# Altium PCB Cooling_Protection PCB.PcbDoc
Units mm, origin at the board's own origin, x right, y up, seen from the top; angles counter-clockwise.
Board outline 50 x 50 mm, 2 copper layers (Top Layer, Bottom Layer); 19 components, 11 nets, 57 pads, 17 vias.
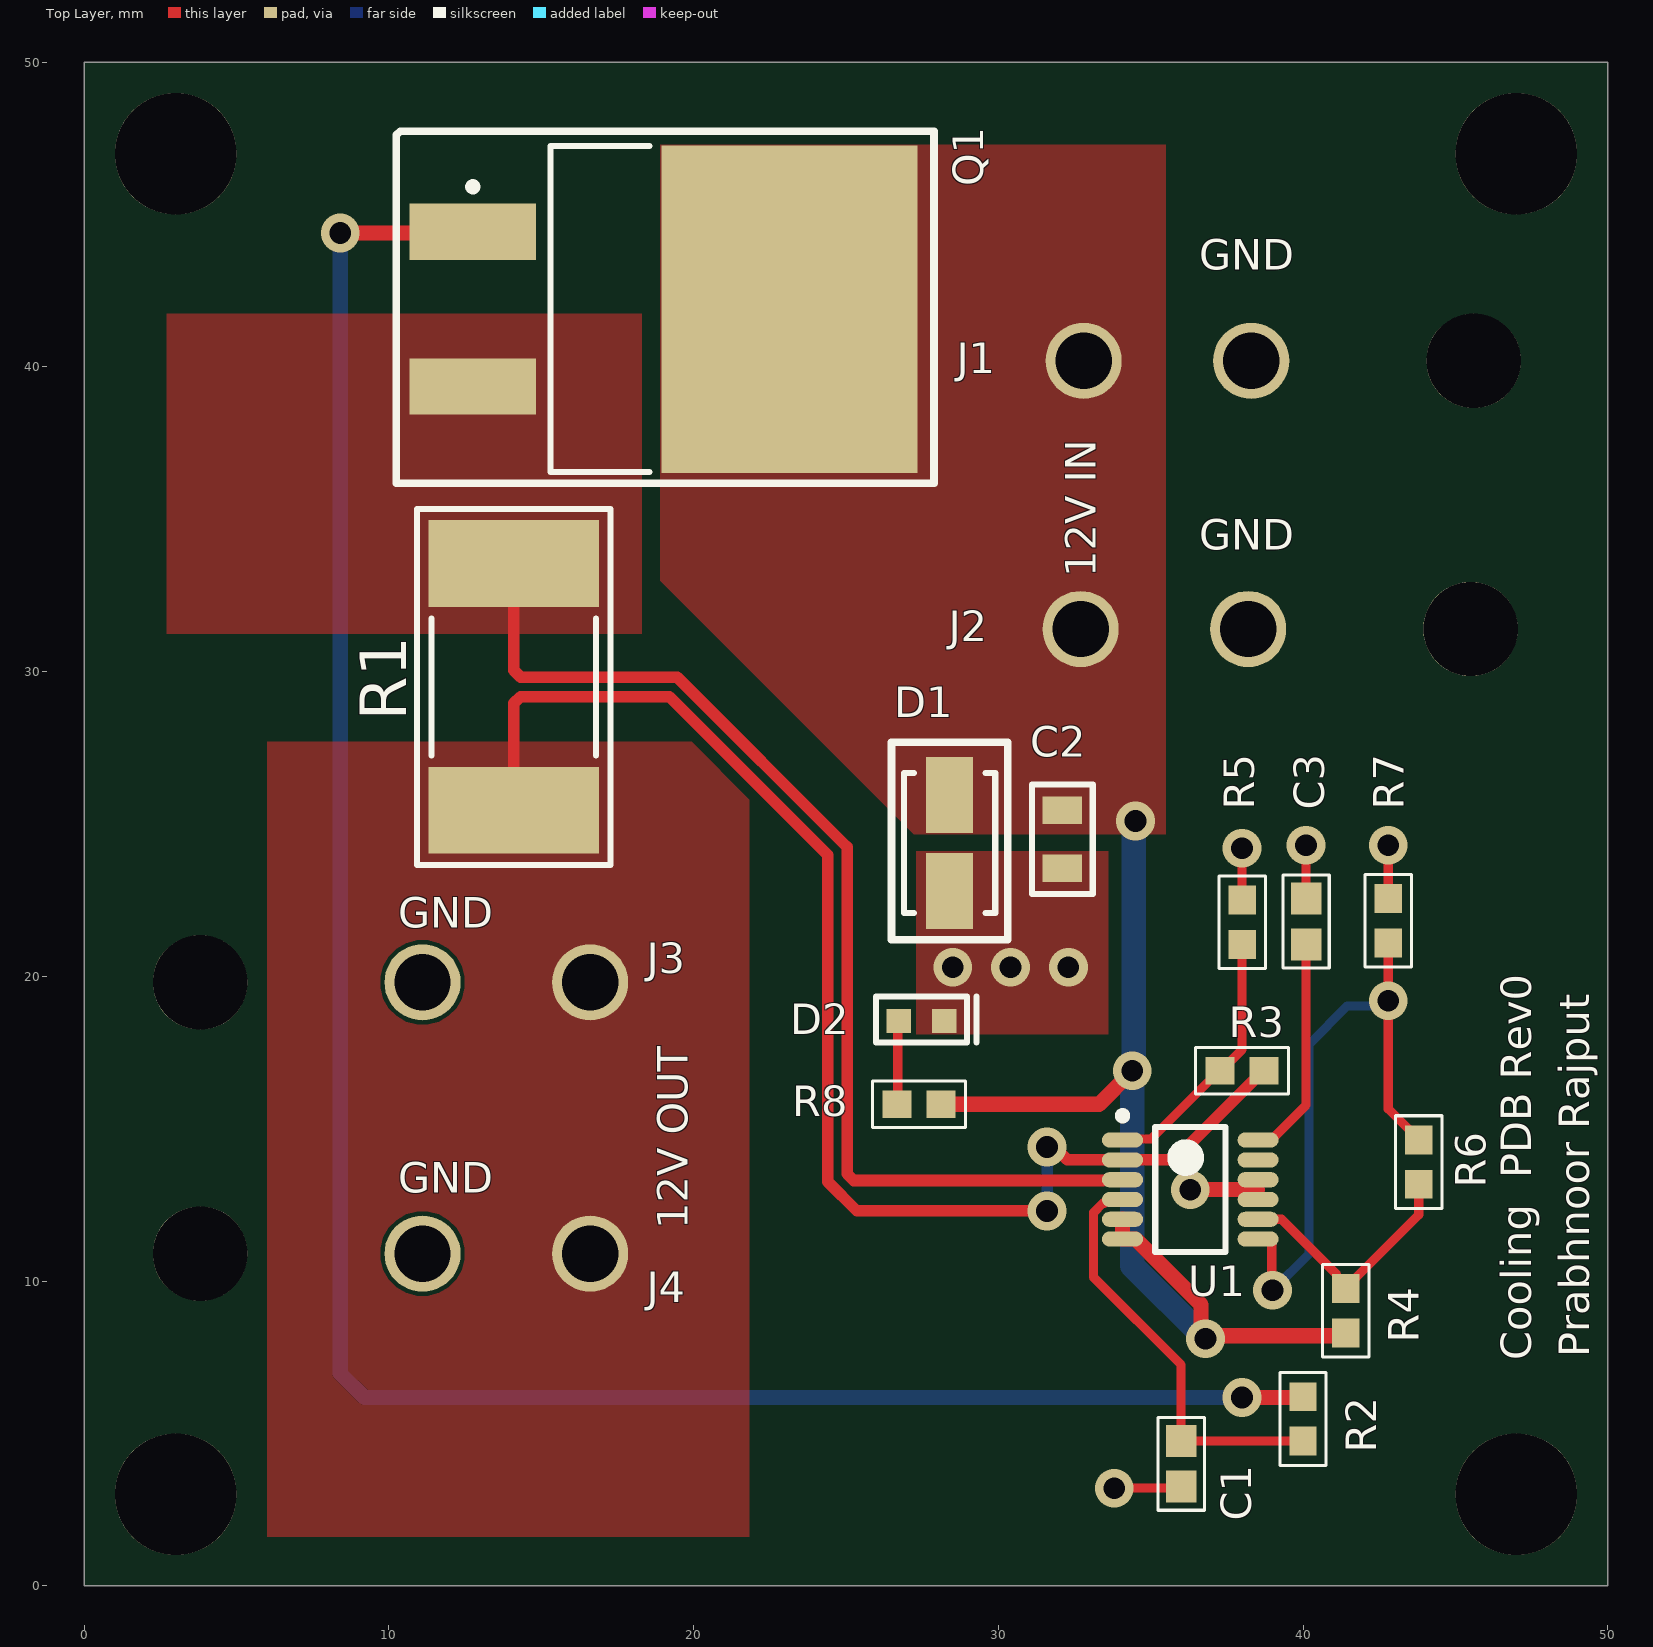
[diagram p0: Top Layer view]
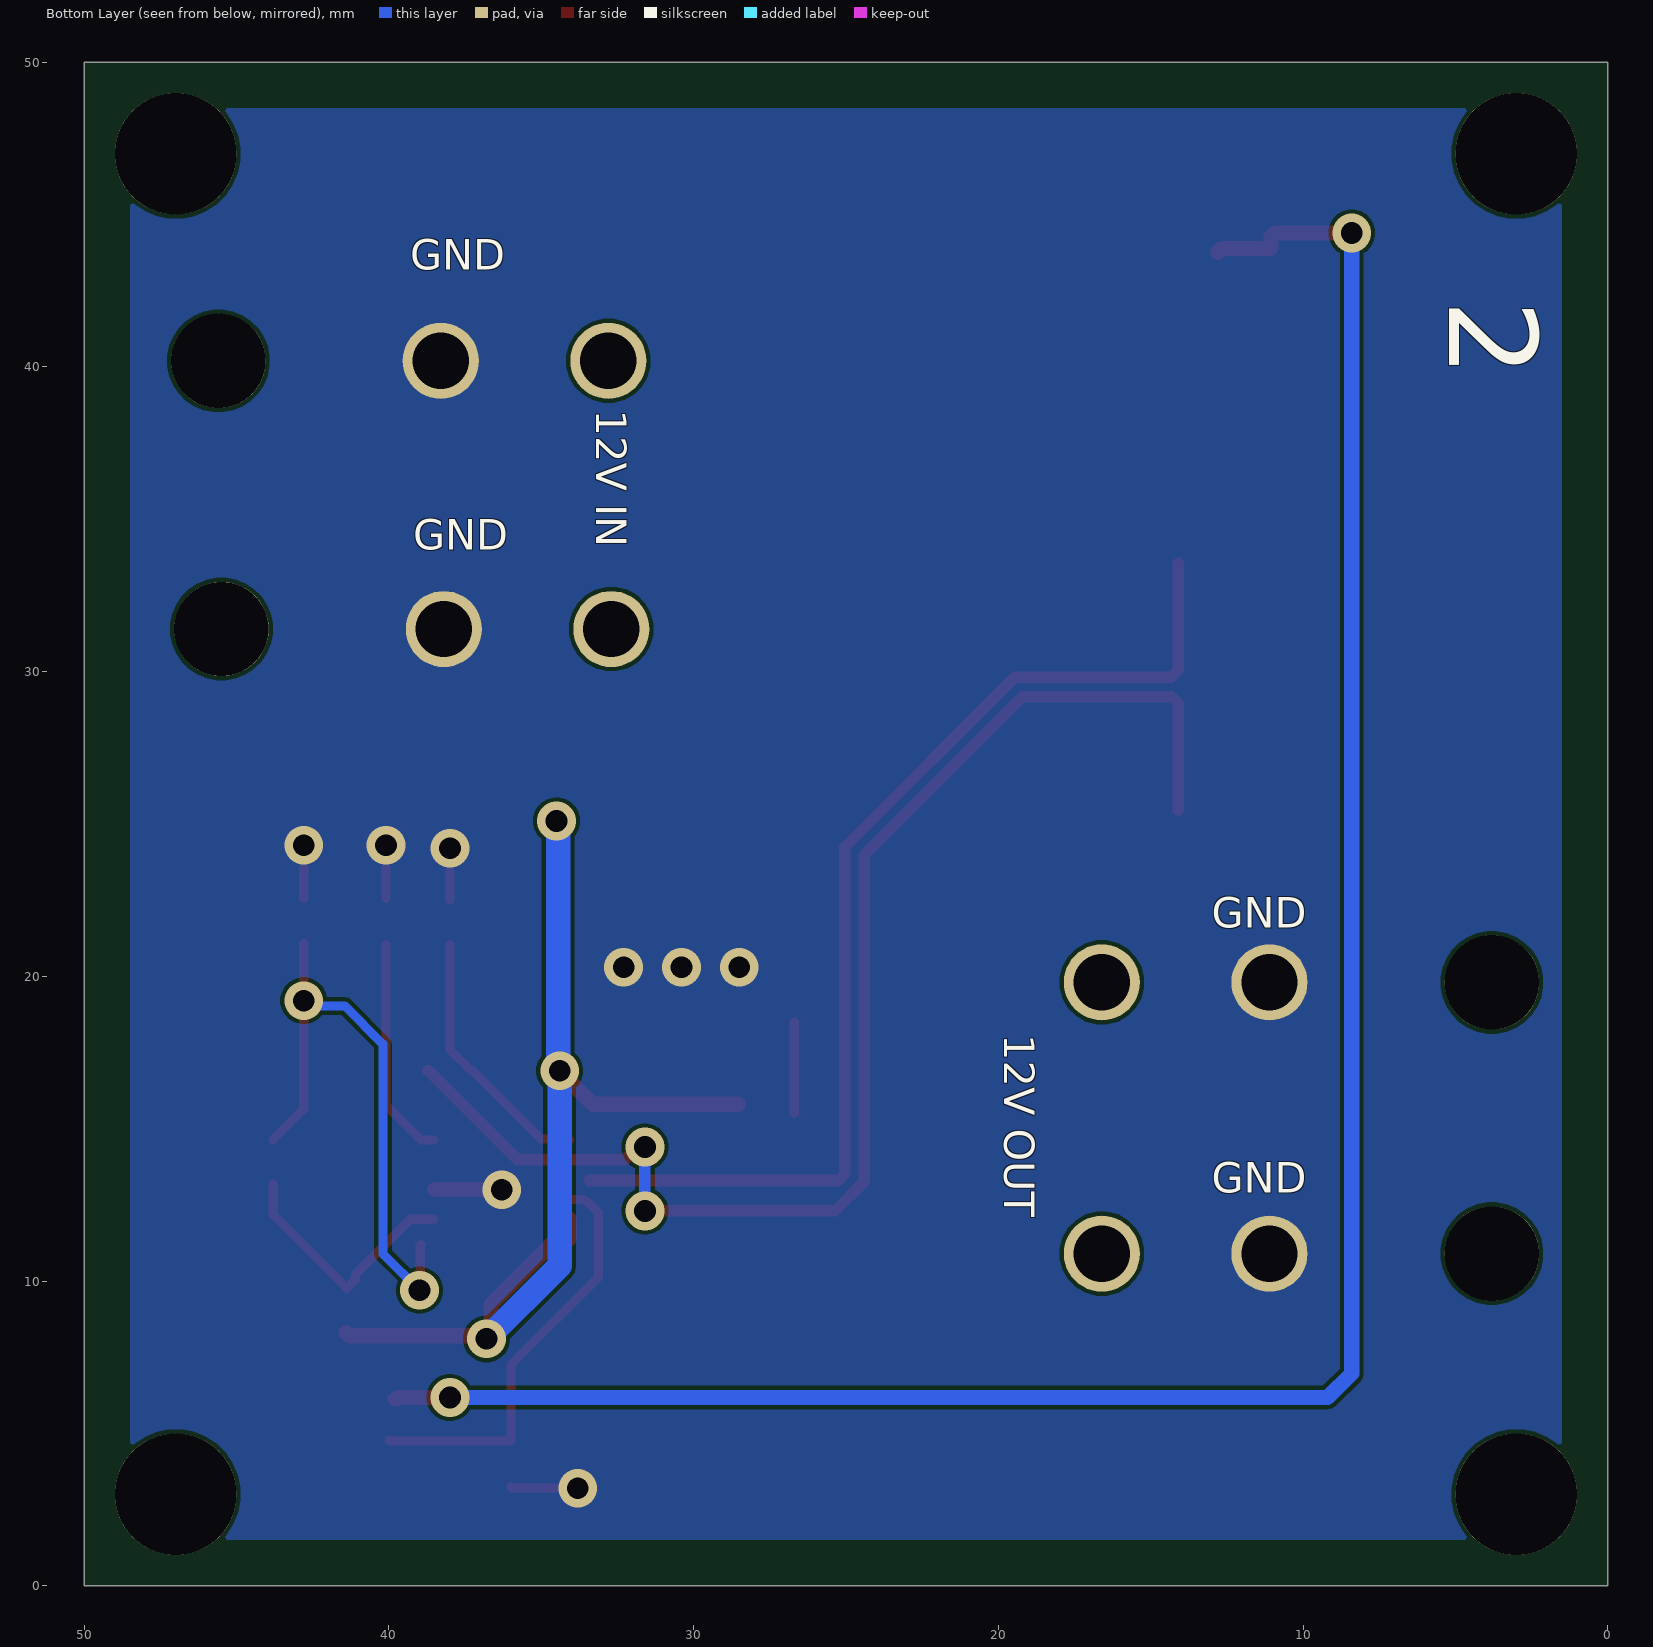
[diagram p1: Bottom Layer view, seen from below]

## Layer stack, top to bottom
Top Solder: solder mask 0.0102, Solder Resist, Dk 3.5
Top Layer: signal copper 0.0356
Dielectric 1: dielectric 0.32, FR-4, Dk 4.8
Bottom Layer: signal copper 0.0356
Bottom Solder: solder mask 0.0102, Solder Resist, Dk 3.5

## Board outline
0,0 50,0 50,50 0,50

## Design rules (kind name [scope] priority, off if disabled: settings)
Clearance [All] p1: gap=0.127 ignorepadtopadclearanceinfootprint=FALSE except(0: Arc-Hole Track-Hole SMDPad-Hole THPad-Hole Via-Hole Fill-Hole Poly-Hole Region-Hole Text-Hole)
DiffPairsRouting [All] p1: maxlimit=0.254 minlimit=0.254 mostfreqgap=0.254 toplayer_minwidth=0.381 toplayer_maxwidth=0.381 toplayer_prefwidth=0.381 bottomlayer_minwidth=0.381 bottomlayer_maxwidth=0.381 bottomlayer_prefwidth=0.381 maxuncoupledlength=12.7
PolygonConnect [All] p1: connectstyle=Direct reliefconductorwidth=0.254 reliefentries=4 polygonreliefangle="90 Angle" airgapwidth=0.254
RoutingVias [All] p1: holewidth=0.711 width=1.27 viastyle="Through Hole" minholewidth=0.711 minwidth=1.27 maxholewidth=0.711 maxwidth=1.27
SolderMaskExpansion [All] p1: expansion=0.102 istentingtop=FALSE
Width [All] p1: maxlimit=5 minlimit=0.2 preferedwidth=0.25 minimp=50.000000 maximp=50.000000 favimp=50.000000
29 further rules are at their usual default settings.

## Classes and differential pairs
differential pair "Vin 12V": +"Vin 12V_P" -"Vin 12V_N"

## Components (designator, comment, footprint, x,y, rotation, side; value= is the part's Value field where it differs from the comment)
C1 "47n" C0603 36,4 r90 top
C2 "0.1u" C0805 32.1,24.5 r90 top
C3 "0.1u" C0603 40.1,21.8 r270 top
D1 "TVS" TVS 28.4,24.375 r270 top
D2 "R-LED" D-0603 27.5,18.6 r0 top
J1 "0768250002" 2X1PIN 32.8,40.2 r90 top
J2 "0768250002" 2X1PIN 32.7,31.4 r90 top
J3 "0768250002" 2X1PIN 16.6,19.8 r270 top
J4 "0768250002" 2X1PIN 16.6,10.9 r270 top
Q1 "N-Channel MOSFET" N-MOS 19,41.9 r0 top
R1 "2.5m" R3921 14.1,29.5 r270 top
R2 "10" R0603 40,5.475 r90 top
R3 "43K" R0603 38,16.9 r0 top
R4 "100k" R0603 41.4,9.025 r90 top
R5 "5.1K" R0603 38,21.775 r270 top
R6 "4.99k" R0603 43.8,13.9 r90 top
R7 "10k" R0603 42.8,21.825 r270 top
R8 "665" R0603 27.4,15.8 r0 top
U1 "LT4363IMS-2#TRPBF" TSOP65P490X110-12N 36.3,13 r0 top

## Footprints (in the part's own frame and the unit in brackets; to place one, negate y for a bottom-side part, rotate by r counter-clockwise, add the part's x,y. Pads: shape width x height; smd on the part's side, far side on the other; paste and mask are expansions set on the pad)
2X1PIN [mm]
  round 2.5 hole 1.85: 1(0,0) 2(0,-5.5)
  round 3.1 hole 3.1: 3(0,-12.8)
  body extent -4.15,-21.4 4.2,0.56, height 14.55
C0603 [mm] "Chip Capacitor, 2-Leads, Body 1.60x0.80mm, IPC Medium Density"
  rect 1.05x1 smd: 1(-0.75,0) 2(0.75,0)
  silkscreen extent -1.52,-0.76 1.52,0.76, body extent -0.87,-0.48 0.87,0.48, height 0.88
C0805 [mm]
  rect 0.9x1.3 smd: 1(-0.95,0) 2(0.95,0)
  silkscreen extent -1.8,-1 1.8,1
D-0603 [mm] "Molded Diode, 2-Leads, Body 1.50x0.80mm, IPC Medium Density"
  rect 0.8x0.8 smd: 1(-0.772,-0.066) 2(0.728,-0.066)
  silkscreen extent -1.52,-0.77 1.78,0.73
N-MOS [mm] "D2-PAK, 3-Pads, Body 7.94x8.70mm (max), IPC Medium Density"
  rect 4.15x1.85 smd: 1(-6.25,2.54) 3(-6.25,-2.54)
  rect 8.4x10.75 smd: 2(4.15,0)
  silkscreen extent -8.76,-5.71 8.89,5.84, body extent -6.58,-5.33 8.67,5.33, height 5.57
R0603 [mm] "Chip Resistor, 2-Leads, Body 1.60x0.80mm, IPC Medium Density"
  rect 0.95x0.9 smd: 1(-0.725,0) 2(0.725,0)
  silkscreen extent -1.52,-0.76 1.52,0.76, body extent -0.85,-0.45 0.85,0.45, height 0.55
R3921 [mm] "Chip Resistor, 2-Leads, Body 10.00x5.20mm, IPC Medium Density"
  rect 2.85x5.6 smd: 1(-4.05,0) 2(4.05,0)
  silkscreen extent -5.84,-3.18 5.84,3.18, body extent -5.13,-2.79 5.13,2.79, height 1.19
TSOP65P490X110-12N [mm] "TSOP, 12-Leads, Body 4.04x3.00mm, Pitch 0.65mm, IPC Medium Density"
  oval 1.35x0.5 smd: 1(-2.225,1.625) 2(-2.225,0.975) 3(-2.225,0.325) 4(-2.225,-0.325) 5(-2.225,-0.975) 6(-2.225,-1.625) 7(2.225,-1.625) 8(2.225,-0.975) 9(2.225,-0.325) 10(2.225,0.325) 11(2.225,0.975) 12(2.225,1.625)
  silkscreen extent -2.35,-2.05 1.15,2.55, body extent -2.45,-2.05 2.45,2.05, height 1.1
TVS [mm] "Molded Inductor, 2-Leads, Body 4.30x2.61mm, IPC Medium Density"
  rect 2.5x1.55 smd: 1(-1.575,0) 2(1.575,0)
  silkscreen extent -3.3,-1.91 3.18,1.91, body extent -2.52,-1.46 2.52,1.46, height 2.4

## Part data
C1: library part C0603C473K5RACTU, "C0603C 47nF Ceramic Multilayer Capacitor; 50 VDC; +125degC; X7R Dielec; +/-10%", Capacitance=47nF, Case Code (Imperial)=0603, Case Code (Metric)=1608, Dielectric=X7R, Dielectric Material=Ceramic, Manufacturer=KEMET, Max Operating Temperature=125°C, Min Operating Temperature=-55°C, Package Quantity=1, Supplier Part Number 1=339-C0603C473K5RAC7867CT-ND, Tolerance=10%, Voltage=50V, Case/Package=0603, Category="Ceramic Capacitors", ComponentLink1Description=https://datasheet.ciiva.com/6074/1776093-6074329.pdf?src-supplier=Farnell, ComponentLink1URL=https://datasheet.ciiva.com/6074/1776093-6074329.pdf?src-supplier=Farnell, ComponentLink2Description=https://datasheet.ciiva.com/28682/1851736-28682298.pdf?src-supplier=Element14, ComponentLink2URL=https://datasheet.ciiva.com/28682/1851736-28682298.pdf?src-supplier=Element14, ComponentLink3Description=https://datasheet.ciiva.com/18193/getdatasheetpartid-94279-18193115.pdf?src-supplier=Verical, ComponentLink3URL=https://datasheet.ciiva.com/18193/getdatasheetpartid-94279-18193115.pdf?src-supplier=Verical, ComponentLink4Description=https://datasheet.ciiva.com/7823/1776093-7823803.pdf?src-supplier=Element14, ComponentLink4URL=https://datasheet.ciiva.com/7823/1776093-7823803.pdf?src-supplier=Element14, ComponentLink5Description=https://datasheet.ciiva.com/7823/1776093-7823804.pdf?src-supplier=Element14, ComponentLink5URL=https://datasheet.ciiva.com/7823/1776093-7823804.pdf?src-supplier=Element14, Construction=Flat, Depth=0.8mm, Dissipation Factor=2.5%, Height=0.8mm, Lead Pitch=0.7mm, Length=1.6mm, Manufacturer Part Number=C0603C473K5RACTU, Mount="Surface Mount,PCB", Number of Pins=2, Packaging="Tape and Reel", Pricing 1="1=0.10000, 10=0.07100, 50=0.03860, 100=0.03160, 500=0.02254, 1000=0.01771 (USD)", Radiation Hardening=No, REACH SVHC="No SVHC", RoHS=Yes, RoHS Compliant=Yes, Series=C, Stock 1=1799272, Supplier 1=Digi-Key, Termination=SMD/SMT, Thickness=0.034inch, Voltage Rating=50V, Voltage Rating (DC)=50V, Width=0.8mm
C2: library part C0805C104Z5VACTU, "Cap Ceramic 0.1uF 50V Y5V -20% to 80% SMD 0805 85°C Paper T/R", Capacitance=100nF, Case Code (Imperial)=0805, Case Code (Metric)=2012, Dielectric=Y5V, Dielectric Material=Ceramic, Manufacturer=KEMET, Max Operating Temperature=85°C, Min Operating Temperature=-30°C, Package Quantity=1, Supplier Part Number 1=399-C0805C104Z5VAC7800CT-ND, Tolerance=80%, Voltage=50V, Case/Package=0805, Category="Ceramic Capacitors", ComponentLink1Description=https://datasheet.ciiva.com/7842/1470417-7842543.pdf?src-supplier=Element14, ComponentLink1URL=https://datasheet.ciiva.com/7842/1470417-7842543.pdf?src-supplier=Element14, ComponentLink2Description=https://datasheet.ciiva.com/18219/getdatasheetpartid-37101-18219255.pdf?src-supplier=Verical, ComponentLink2URL=https://datasheet.ciiva.com/18219/getdatasheetpartid-37101-18219255.pdf?src-supplier=Verical, ComponentLink3Description=https://datasheet.ciiva.com/26847/getdatasheetpartid-321176-26847799.pdf?src-supplier=Verical, ComponentLink3URL=https://datasheet.ciiva.com/26847/getdatasheetpartid-321176-26847799.pdf?src-supplier=Verical, ComponentLink4Description=https://datasheet.ciiva.com/14597/70095383-14597846.pdf?src-supplier=Allied+Electronics, ComponentLink4URL=https://datasheet.ciiva.com/14597/70095383-14597846.pdf?src-supplier=Allied+Electronics, ComponentLink5Description=https://datasheet.ciiva.com/14608/70095383-14608251.pdf?src-supplier=Allied+Electronics, ComponentLink5URL=https://datasheet.ciiva.com/14608/70095383-14608251.pdf?src-supplier=Allied+Electronics, Construction=Flat, Depth=1.25mm, Dissipation Factor=5%, Height=0.9mm, Lead Free="Lead Free", Lead Pitch=0.75mm, Length=2mm, Manufacturer Part Number=C0805C104Z5VACTU, Mount="Surface Mount,PCB", Number of Pins=2, Packaging="Tape and Reel", Pricing 1="1=0.10000, 10=0.05000, 50=0.02700, 100=0.02210, 500=0.01578, 1000=0.01240 (USD)", Radiation Hardening=No, REACH SVHC="No SVHC", RoHS=Yes, RoHS Compliant=Yes, Series=C0805C, Stock 1=1385, Supplier 1=Digi-Key, Termination=SMD/SMT, Thickness=0.039inch, Voltage Rating=50V, Voltage Rating (DC)=50V, Width=0.049inch
C3: library part C0603C104M4RACTU, "Cap Ceramic 0.1uF 16V X7R 20% SMD 0603 125°C Paper T/R", Capacitance=100nF, Case Code (Imperial)=0603, Case Code (Metric)=1608, Dielectric=X7R, Dielectric Material=Ceramic, Manufacturer=KEMET, Max Operating Temperature=125°C, Min Operating Temperature=-55°C, Package Quantity=1, Supplier Part Number 1=339-C0603C104M4RAC7867CT-ND, Tolerance=20%, Voltage Rating=16V, Case/Package=0603, Category="Ceramic Capacitors", ComponentLink1Description=https://datasheet.ciiva.com/7823/kem-c1002-x7r-smd-7823992.pdf?src-supplier=Element14, ComponentLink1URL=https://datasheet.ciiva.com/7823/kem-c1002-x7r-smd-7823992.pdf?src-supplier=Element14, ComponentLink2Description=https://datasheet.ciiva.com/7823/kem-c1002-x7r-smd-7823993.pdf?src-supplier=Element14, ComponentLink2URL=https://datasheet.ciiva.com/7823/kem-c1002-x7r-smd-7823993.pdf?src-supplier=Element14, ComponentLink3Description=https://datasheet.ciiva.com/14589/70095383-14589450.pdf?src-supplier=Allied+Electronics, ComponentLink3URL=https://datasheet.ciiva.com/14589/70095383-14589450.pdf?src-supplier=Allied+Electronics, ComponentLink4Description=https://datasheet.ciiva.com/18102/getdatasheetpartid-66190-18102310.pdf?src-supplier=Verical, ComponentLink4URL=https://datasheet.ciiva.com/18102/getdatasheetpartid-66190-18102310.pdf?src-supplier=Verical, ComponentLink5Description=https://datasheet.ciiva.com/18192/getdatasheetpartid-302288-18192716.pdf?src-supplier=Verical, ComponentLink5URL=https://datasheet.ciiva.com/18192/getdatasheetpartid-302288-18192716.pdf?src-supplier=Verical, Construction=Flat, Depth=0.8mm, Height=0.8mm, Lead Pitch=0.7mm, Length=1.6mm, Manufacturer Part Number=C0603C104M4RACTU, Mount="Surface Mount,PCB", Number of Pins=2, Packaging="Tape and Reel", Pricing 1="1=0.10000, 10=0.03300, 50=0.01800, 100=0.01470, 500=0.01046, 1000=0.00822 (USD)", Radiation Hardening=No, REACH SVHC="No SVHC", RoHS=Yes, RoHS Compliant=Yes, Series=C, Stock 1=293652, Supplier 1=Digi-Key, Termination=SMD/SMT, Thickness=0.034inch, Voltage Rating (DC)=16V, Width=0.031inch
D1: library part SMAJ58A-13-F, "SMAJ Series 58 V 400 W SMT Uni-Directional TVS Diode - DO-214AC", Breakdown Voltage=64.4V, Capacitance=180pF, Case/Package=SMA, Clamping Voltage=93.6V, Current=43A, Forward Voltage=3.5V, Leakage Current=5uA, Manufacturer=Diodes, Max Breakdown Voltage=71.2V, Max Operating Temperature=150°C, Max Output Current=4.3A, Max Power Dissipation=400W, Min Operating Temperature=-55°C, Package Quantity=5000, Power Line Protection=No, Resistor Type=Zener, Reverse Standoff Voltage=58V, Supplier Part Number 1=7515010, Test Current=1mA, Category="TVS Diodes", Clamping Voltage-Max=93.6V, ComponentLink1Description=https://datasheet.ciiva.com/334/ds19005-334624.pdf?src-supplier=Digi-Key, ComponentLink1URL=https://datasheet.ciiva.com/334/ds19005-334624.pdf?src-supplier=Digi-Key, ComponentLink2Description=https://datasheet.ciiva.com/34302/1542135-34302430.pdf?src-supplier=Jameco, ComponentLink2URL=https://datasheet.ciiva.com/34302/1542135-34302430.pdf?src-supplier=Jameco, Contact Plating=Tin,Matte, Diode Type=ZENER, Direction=Unidirectional, Element Configuration=Single, ESD Protection=No, Height=2.3mm, Lead Free="Lead Free", Length=2.92mm, Manufacturer Part Number=SMAJ58A-13-F, Max Reverse Leakage Current=5uA, Min Breakdown Voltage=64.4V, Mount="Surface Mount", Number of Elements=1, Number of Pins=2, Number of Unidirectional Channels=1, Packaging="Tape and Reel", Peak Pulse Current=4.3A, Peak Pulse Power=400W, Polarity=Unidirectional, Power Dissipation=400W, Pricing 1="50=0.37000, 250=0.16700, 1250=0.12900, 2500=0.12200, 5000=0.11100 (USD)", Radiation Hardening=No, Reverse Breakdown Voltage=64.4V, RoHS=Yes, RoHS Compliant=Yes, Series=-, Stock 1=1, Supplier 1=RSComponents, Termination=SMD/SMT, Voltage=58V, Width=4.6mm, Working Voltage=58V
D2: library part 150060RS75000, "LED Low-Power Uni-Color Red 630nm 2V 2-Pin Chip 0603(1608Metric) T/R", Case Code (Imperial)=0603, Case Code (Metric)=1608, Color=Red, Forward Current=30mA, Forward Voltage=2V, Manufacturer="Wurth Electronics", Max Operating Temperature=85°C, Min Operating Temperature=-40°C, Package Quantity=1, Supplier Part Number 1=732-4978-1-ND, Test Current=20mA, Case/Package=0603, Category=LEDs, ComponentLink1Description=https://datasheet.ciiva.com/29563/150060rs75000-29563040.pdf?src-supplier=Digi-Key, ComponentLink1URL=https://datasheet.ciiva.com/29563/150060rs75000-29563040.pdf?src-supplier=Digi-Key, ComponentLink2Description=https://datasheet.ciiva.com/29279/759428-da-01-en-chipled-0603-w-kl-rot-150060rs75000-29279196.pdf?src-supplier=Conrad, ComponentLink2URL=https://datasheet.ciiva.com/29279/759428-da-01-en-chipled-0603-w-kl-rot-150060rs75000-29279196.pdf?src-supplier=Conrad, Dominant Wavelength=625nm, Height=0.7mm, Length=1.6mm, Lens Style=Clear,Rectangular, Luminous Intensity=250mcd, Manufacturer Part Number=150060RS75000, Mount="Surface Mount", Packaging="Cut Tape", Pricing 1="1=0.15000, 50=0.13800, 100=0.11800, 500=0.10200, 1000=0.09900 (USD)", REACH SVHC=Unknown, RoHS=Yes, RoHS Compliant=Yes, Stock 1=42280, Supplier 1=Digi-Key, Viewing Angle=140°, Wavelength=625nm, Width=0.8mm
J1 J2 J3 J4: library part 2X1PIN, "CONN HEADER R/A 2POS", Color=Black, Manufacturer=Molex, Manufacturer Part Number=76825-0002, Supplier Part Number 1=WM11969-ND, ComponentLink1Description=http://www.farnell.com/datasheets/1968956.pdf?src-supplier=Element14, ComponentLink1URL=http://www.farnell.com/datasheets/1968956.pdf?src-supplier=Element14, ComponentLink2Description=http://www.farnell.com/datasheets/2216551.pdf?src-supplier=Newark, ComponentLink2URL=http://www.farnell.com/datasheets/2216551.pdf?src-supplier=Newark, ComponentLink3Description=http://www.farnell.com/datasheets/2216551.pdf?src-supplier=Farnell, ComponentLink3URL=http://www.farnell.com/datasheets/2216551.pdf?src-supplier=Farnell, ComponentLink4Description=https://www.molex.com/pdm_docs/sd/768250002_sd.pdf?src-supplier=Digi-Key, ComponentLink4URL=https://www.molex.com/pdm_docs/sd/768250002_sd.pdf?src-supplier=Digi-Key, ComponentLink5Description=http://www.farnell.com/datasheets/2001779.pdf?src-supplier=Element14, ComponentLink5URL=http://www.farnell.com/datasheets/2001779.pdf?src-supplier=Element14, ComponentLink6Description=http://www.alliedelec.com/images/products/datasheets/bm/BrandonData/70717238.pdf?src-supplier=Allied+Electronics, ComponentLink6URL=http://www.alliedelec.com/images/products/datasheets/bm/BrandonData/70717238.pdf?src-supplier=Allied+Electronics, Contact Material=Copper, Contact Plating=Tin, Gender=Male, Number of Circuits=2, Number of Contacts=2, Number of Rows=2, Orientation="Right Angle", Pitch=5.7mm, Pricing 1="1=1.13, 10=0.993, 25=0.9344, 50=0.8956, 100=0.8567, 250=0.7788, 500=0.70092, 1000=0.62304, 2500=0.56463 (USD)", REACH SVHC=Unknown, Stock 1=0, Supplier 1=Digi-Key, Termination="Through Hole"
Q1: library part FDB33N25TM, "N-Channel Power MOSFET, UniFETTM, 250 V, 33 A, 94 mΩ, D2PAK", Case/Package=D2PAK, Continuous Drain Current (ID)=33A, Drain to Source Breakdown Voltage=250V, Drain to Source Resistance=94mR, Drain-source On Resistance-Max=94MR, Gate to Source Voltage (Vgs)=30V, Input Capacitance=2.135nF, Manufacturer="ON Semiconductor / Fairchild", Max Operating Temperature=150°C, Max Power Dissipation=235W, Min Operating Temperature=-55°C, Package Quantity=800, Supplier Part Number 1=7598973, Threshold Voltage=3V, Category=MOSFETs, ComponentLink1Description=https://datasheet.ciiva.com/22655/1781196-22655255.pdf?src-supplier=Element14, ComponentLink1URL=https://datasheet.ciiva.com/22655/1781196-22655255.pdf?src-supplier=Element14, ComponentLink2Description=https://datasheet.ciiva.com/25625/0900766b810c95c5-25625337.pdf?src-supplier=RSComponents, ComponentLink2URL=https://datasheet.ciiva.com/25625/0900766b810c95c5-25625337.pdf?src-supplier=RSComponents, ComponentLink3Description=https://datasheet.ciiva.com/26145/fdb33n25-26145111.pdf?src-supplier=Avnet+Europe, ComponentLink3URL=https://datasheet.ciiva.com/26145/fdb33n25-26145111.pdf?src-supplier=Avnet+Europe, ComponentLink4Description=https://datasheet.ciiva.com/933/fdb33n25-933830.pdf?src-supplier=Digi-Key, ComponentLink4URL=https://datasheet.ciiva.com/933/fdb33n25-933830.pdf?src-supplier=Digi-Key, ComponentLink5Description=https://datasheet.ciiva.com/933/fdb33n25-933831.pdf?src-supplier=Digi-Key, ComponentLink5URL=https://datasheet.ciiva.com/933/fdb33n25-933831.pdf?src-supplier=Digi-Key, Contact Plating=Tin,Matte, Drain to Source Voltage (Vdss)=250V, Element Configuration=Single, Fall Time=120ns, Height=4.83mm, Lead Free="Lead Free", Length=10.67mm, Manufacturer Part Number=FDB33N25TM, Mount="Surface Mount", Nominal Vgs=3V, Number of Elements=1, Number of Pins=3, On-State Resistance=94MR, Packaging="Tape and Reel", Polarity=N-CHANNEL, Power Dissipation=235W, Pricing 1="2=2.32700, 10=1.98700, 100=1.54200, 250=1.50000, 500=1.29900, 2=1.67500, 10=1.43000, 100=1.11000, 250=1.08000, 500=0.93500 (USD)", Radiation Hardening=No, Rds On Max=94mR, REACH SVHC="No SVHC", Rise Time=230ns, RoHS=Yes, Series=UniFET™, Stock 1=86, Supplier 1=RSComponents, Turn-Off Delay Time=75ns, Turn-On Delay Time=35ns, Weight=1.31247g, Width=11.33mm
R1: library part WSLP39212L500FEA, "Res Metal Strip 3921 0.0025 Ohm 1% 5W 50ppm/°C Pad SMD Automotive T/R", Case/Package=3921, Manufacturer="Vishay Dale", Max Operating Temperature=170°C, Max Power Dissipation=9W, Min Operating Temperature=-65°C, Package Quantity=3000, Resistance=2.5mR, Resistor Type="Metal Element", Supplier Part Number 1=541-WSLP39212L500FEACT-ND, Temperature Coefficient=75ppm/°C, Tolerance=1%, Category="Chip SMD Resistors", ComponentLink1Description=http://www.vishay.com/docs/30176/wslp3921.pdf?src-supplier=Digi-Key, ComponentLink1URL=http://www.vishay.com/docs/30176/wslp3921.pdf?src-supplier=Digi-Key, Features="Moisture Resistant", Height=0.02inch, Length=0.394inch, Manufacturer Part Number=WSLP39212L500FEA, Number of Terminations=2, Packaging="Tape and Reel", Pricing 1="1=1.99000, 10=1.76100, 25=1.63320, 50=1.53720, 100=1.34500, 250=1.15288, 500=0.96076, 1000=0.85400 (USD)", RoHS=Yes, RoHS Compliant=Yes, Stock 1=2532, Supplier 1=Digi-Key, Width=0.205inch
R2: library part KTR03EZPF10R0, "KTR Series 0603 10 Ohm ±1 % 0.1 W ±100 ppm/°C Surface Mount Thick Film Resistor", Case Code (Imperial)=0603, Case Code (Metric)=1608, Manufacturer=Rohm, Max Operating Temperature=155°C, Max Power Dissipation=100mW, Min Operating Temperature=-55°C, Package Quantity=1, Resistance=10R, Resistor Type="Thick Film", Supplier Part Number 1=RHM10.0AYCT-ND, Temperature Coefficient=100ppm/°C, Tolerance=1%, Case/Package=0603, Category="Chip SMD Resistors", ComponentLink1Description=https://datasheet.ciiva.com/2498/ktr-2498917.pdf?src-supplier=Digi-Key, ComponentLink1URL=https://datasheet.ciiva.com/2498/ktr-2498917.pdf?src-supplier=Digi-Key, ComponentLink2Description=https://datasheet.ciiva.com/2498/ktr-2498918.pdf?src-supplier=Digi-Key, ComponentLink2URL=https://datasheet.ciiva.com/2498/ktr-2498918.pdf?src-supplier=Digi-Key, ComponentLink3Description=https://datasheet.ciiva.com/2498/ktr-2498919.pdf?src-supplier=Digi-Key, ComponentLink3URL=https://datasheet.ciiva.com/2498/ktr-2498919.pdf?src-supplier=Digi-Key, Features="Automotive AEC-Q200", Height=0.022inch, Lead Free="Lead Free", Length=0.063inch, Manufacturer Part Number=KTR03EZPF10R0, Number of Terminations=2, Packaging="Tape and Reel", Pricing 1="1=0.15000, 10=0.13500, 100=0.05180, 1000=0.02277, 2500=0.01966 (USD)", RoHS=Yes, RoHS Compliant=Yes, Series=KTR, Stock 1=25, Supplier 1=Digi-Key, Width=0.031inch
R3: library part RNCF0603DTE43K0, "RNCF Precision Thin Film Chip Resistor 0603 Size 43K Ohm 0.5% 0.166 W 25 ppm/°C 2-Pin SMD T/R", Case/Package=0603, Manufacturer="Stackpole Electronics", Max Operating Temperature=155°C, Min Operating Temperature=-55°C, Power Rating=63mW, Resistance=43kR, Supplier Part Number 1=RNCF0603DTE43K0CT-ND, Tolerance=0.5%, Category="Chip SMD Resistors", ComponentLink1Description=https://www.seielect.com/catalog/sei-rncf.pdf?src-supplier=Digi-Key, ComponentLink1URL=https://www.seielect.com/catalog/sei-rncf.pdf?src-supplier=Digi-Key, Manufacturer Part Number=RNCF0603DTE43K0, Mount="Surface Mount", Packaging="Tape and Reel", Pricing 1="1=0.13000, 10=0.11000, 100=0.04300, 1000=0.01800, 2500=0.01650 (USD)", RoHS=Yes, RoHS Compliant=Yes, Stock 1=9867, Supplier 1=Digi-Key
R4: library part RE0603FRE07100KL, "Res Thick Film 0603 100K Ohm 1% 1/10W ±50ppm/°C Molded SMD Paper T/R", Case/Package=0603, Manufacturer=Yageo, Max Operating Temperature=155°C, Max Power Dissipation=100mW, Min Operating Temperature=-55°C, Resistance=100kR, Resistor Type="Thick Film", Supplier Part Number 1=13-RE0603FRE07100KLCT-ND, Temperature Coefficient=50ppm/°C, Tolerance=1%, Category="Chip SMD Resistors", ComponentLink1Description=http://www.yageo.com/NewPortal/yageodocoutput?fileName=/pdf/R-Chip/PYu-RE_105_RoHS_L_6.pdf&src-supplier=Digi-Key, ComponentLink1URL=http://www.yageo.com/NewPortal/yageodocoutput?fileName=/pdf/R-Chip/PYu-RE_105_RoHS_L_6.pdf&src-supplier=Digi-Key, Features="Moisture Resistant", Height=0.022inch, Length=0.063inch, Manufacturer Part Number=RE0603FRE07100KL, Number of Terminations=2, Packaging="Tape and Reel", Pricing 1="1=0.10000, 10=0.03600, 100=0.01450, 1000=0.00649, 2500=0.00563 (USD)", RoHS=Yes, RoHS Compliant=Yes, Stock 1=8496, Supplier 1=Digi-Key, Width=0.032inch
R5: library part ERJ-3EKF5101V, "Res Thick Film 0603 5.1K Ohm 1% 1/10W ±100ppm/°C Molded SMD Punched Carrier T/R", Case Code (Imperial)=0603, Case Code (Metric)=1608, Manufacturer=Panasonic, Max Operating Temperature=155°C, Max Power Dissipation=100mW, Min Operating Temperature=-55°C, Package Quantity=1, Resistance=5.1kR, Resistance Tolerance=1%, Resistor Type="Thick Film", Supplier Part Number 1=P5.10KHCT-ND, Temperature Coefficient=100ppm/°C, Voltage Rating=75V, Case/Package=0603, Category="Chip SMD Resistors", ComponentLink1Description=https://datasheet.ciiva.com/5860/426256-5860664.pdf?src-supplier=Farnell, ComponentLink1URL=https://datasheet.ciiva.com/5860/426256-5860664.pdf?src-supplier=Farnell, ComponentLink2Description=https://datasheet.ciiva.com/28547/1678782-28547194.pdf?src-supplier=Element14, ComponentLink2URL=https://datasheet.ciiva.com/28547/1678782-28547194.pdf?src-supplier=Element14, ComponentLink3Description=https://datasheet.ciiva.com/28686/1678782-28686921.pdf?src-supplier=Element14, ComponentLink3URL=https://datasheet.ciiva.com/28686/1678782-28686921.pdf?src-supplier=Element14, ComponentLink4Description=https://datasheet.ciiva.com/16785/70260748-16785996.pdf?src-supplier=Allied+Electronics, ComponentLink4URL=https://datasheet.ciiva.com/16785/70260748-16785996.pdf?src-supplier=Allied+Electronics, ComponentLink5Description=https://datasheet.ciiva.com/16440/aoa0000ce3-16440166.pdf?src-supplier=Future+Electronics, ComponentLink5URL=https://datasheet.ciiva.com/16440/aoa0000ce3-16440166.pdf?src-supplier=Future+Electronics, ComponentLink6Description=https://datasheet.ciiva.com/16523/aoa0000ce2-16523461.pdf?src-supplier=Avnet+Asia, ComponentLink6URL=https://datasheet.ciiva.com/16523/aoa0000ce2-16523461.pdf?src-supplier=Avnet+Asia, Construction=Rectangular, Contact Plating=Tin, Depth=0.8mm, Features="Automotive AEC-Q200", Height=0.022inch, Lead Free="Lead Free", Length=1.6mm, Manufacturer Part Number=ERJ-3EKF5101V, Military Standard=Not, Mount="Surface Mount", Number of Terminations=2, Packaging="Tape and Reel", Power Rating=100mW, Pricing 1="1=0.10000, 10=0.04200, 100=0.01700, 1000=0.00762, 2500=0.00661 (USD)", Radiation Hardening=No, REACH SVHC="No SVHC", RoHS=Yes, RoHS Compliant=Yes, Series=ERJ, Size Code=0603, Stock 1=35748, Supplier 1=Digi-Key, Termination=SMD/SMT, Tolerance=1%, Voltage Rating (DC)=75V, Weight=7.1E-05oz, Width=0.8mm
R6: library part RMCF0603FT4K99, "Res Thick Film 0603 4.99K Ohm 1% 1/10W ±100ppm/°C Molded SMD SMD Paper T/R", Case Code (Imperial)=0603, Case Code (Metric)=1608, Manufacturer="Stackpole Electronics", Max Operating Temperature=155°C, Max Power Dissipation=100mW, Min Operating Temperature=-55°C, Package Quantity=1, Resistance=4.99kR, Resistor Type="Thick Film", Supplier Part Number 1=RMCF0603FT4K99CT-ND, Temperature Coefficient=100ppm/°C, Tolerance=1%, Working Voltage=75V, Case/Package=0603, Category="Chip SMD Resistors", ComponentLink1Description=https://datasheet.ciiva.com/15215/getdatasheetpartid-407528-15215989.pdf?src-supplier=Verical, ComponentLink1URL=https://datasheet.ciiva.com/15215/getdatasheetpartid-407528-15215989.pdf?src-supplier=Verical, Construction=Rectangular, Contact Plating=Tin,Matte, Depth=0.8mm, Features="Automotive AEC-Q200", Height=0.022inch, Lead Free="Lead Free", Length=1.55mm, Manufacturer Part Number=RMCF0603FT4K99, Military Standard=Not, Mount="Surface Mount", Number of Terminations=2, Packaging="Tape and Reel", Power Rating=100mW, Pricing 1="1=0.10000, 10=0.01700, 100=0.00680, 1000=0.00305, 2500=0.00264 (USD)", Radiation Hardening=No, RoHS=Yes, RoHS Compliant=Yes, Series=RMCF, Stock 1=1158, Supplier 1=Digi-Key, Technology="THICK FILM", Width=0.031inch
R7: library part RC1608F103CS, "Res Thick Film 0603 10K Ohm 1% 1/10W ±100ppm/°C Molded SMD SMD T/R", Case Code (Imperial)=0603, Case Code (Metric)=1608, Manufacturer=Samsung, Max Operating Temperature=155°C, Max Power Dissipation=100mW, Min Operating Temperature=-55°C, Resistance=10kR, Resistor Type="Thick Film", Supplier Part Number 1=1276-3485-1-ND, Temperature Coefficient=100ppm/°C, Tolerance=1%, Case/Package=0603, Category="Chip SMD Resistors", ComponentLink1Description=https://datasheet.ciiva.com/16200/rc-series-16200170.pdf?src-supplier=Future+Electronics, ComponentLink1URL=https://datasheet.ciiva.com/16200/rc-series-16200170.pdf?src-supplier=Future+Electronics, Construction=Rectangular, Contact Plating=Tin, Depth=0.8mm, Features="Moisture Resistant", Height=0.022inch, Length=0.063inch, Manufacturer Part Number=RC1608F103CS, Military Standard=Not, Number of Terminations=2, Packaging="Tape and Reel", Power Rating=100mW, Pricing 1="1=0.10000, 10=0.07400, 100=0.02850, 1000=0.01254 (USD)", Radiation Hardening=No, RoHS=Yes, RoHS Compliant=Yes, Series=RC, Size Code=0603, Stock 1=1193, Supplier 1=Digi-Key, Width=0.031inch
R8: library part RC0603FR-07665RL, "Res Thick Film 0603 665 Ohm 1% 1/10W ±100ppm/°C Molded SMD Paper T/R", Case Code (Imperial)=0603, Case Code (Metric)=1608, Manufacturer=Yageo, Max Operating Temperature=155°C, Max Power Dissipation=100mW, Min Operating Temperature=-55°C, Package Quantity=1, Resistance=665R, Resistor Type="Thick Film", Supplier Part Number 1=311-665HRCT-ND, Temperature Coefficient=100ppm/°C, Tolerance=1%, Voltage Rating=75V, Voltage Rating (DC)=50V, Case/Package=0603, Category="Chip SMD Resistors", ComponentLink1Description=https://datasheet.ciiva.com/8885/pyu-rc0603-51-rohs-l-4-8885031.pdf?src-supplier=Avnet, ComponentLink1URL=https://datasheet.ciiva.com/8885/pyu-rc0603-51-rohs-l-4-8885031.pdf?src-supplier=Avnet, ComponentLink2Description=https://datasheet.ciiva.com/2454/pyu-r-int-thick-7-2454390.pdf?src-supplier=Digi-Key, ComponentLink2URL=https://datasheet.ciiva.com/2454/pyu-r-int-thick-7-2454390.pdf?src-supplier=Digi-Key, ComponentLink3Description=https://datasheet.ciiva.com/2454/pyu-r-int-thick-7-2454391.pdf?src-supplier=Digi-Key, ComponentLink3URL=https://datasheet.ciiva.com/2454/pyu-r-int-thick-7-2454391.pdf?src-supplier=Digi-Key, ComponentLink4Description=https://datasheet.ciiva.com/2454/pyu-r-int-thick-7-2454392.pdf?src-supplier=Digi-Key, ComponentLink4URL=https://datasheet.ciiva.com/2454/pyu-r-int-thick-7-2454392.pdf?src-supplier=Digi-Key, ComponentLink5Description=https://datasheet.ciiva.com/28388/pyu-rc0603-51-rohs-l-4-28388745.pdf?src-supplier=Avnet+Europe, ComponentLink5URL=https://datasheet.ciiva.com/28388/pyu-rc0603-51-rohs-l-4-28388745.pdf?src-supplier=Avnet+Europe, Construction=Rectangular, Contact Plating=Tin,Matte, Depth=0.8mm, Features="Moisture Resistant", Height=0.022inch, Lead Free="Lead Free", Length=1.6mm, Manufacturer Part Number=RC0603FR-07665RL, Military Standard=Not, Number of Terminations=2, Packaging="Tape and Reel", Power Rating=100mW, Pricing 1="1=0.10000, 10=0.02400, 100=0.00970, 1000=0.00436, 2500=0.00378 (USD)", RoHS=Yes, RoHS Compliant=Yes, Series=RC, Stock 1=146637, Supplier 1=Digi-Key, Termination=SMD/SMT, Weight=7.1E-05oz, Width=0.8mm
U1: "Ms-Hot Swap/High Voltage High Voltage Surge Stopper With Current Limit. Auto-Retry After Fault", Case/Package=TSSOP, Clamping Voltage=27V, Manufacturer="Analog Devices / Linear Technology", Package Quantity=2500, Supplier Part Number 1=LT4363IMS-2#TRPBFDKR-ND, Working Voltage=80V, Category="Voltage Supervisors", ComponentLink1Description=https://datasheet.ciiva.com/329/40854-329672.pdf?src-supplier=Digi-Key, ComponentLink1URL=https://datasheet.ciiva.com/329/40854-329672.pdf?src-supplier=Digi-Key, Lead Free="Lead Free", Manufacturer Part Number=LT4363IMS-2#TRPBF, Number of Circuits=1, Number of Pins=12, Packaging="Tape and Reel", Pricing 1="1=6.21000, 10=5.57500, 25=5.27080, 100=4.56810, 250=4.33380, 500=3.88872, 1000=3.64650 (USD)", RoHS=Yes, RoHS Compliant=Yes, Supplier 1=Digi-Key

## Free pads (board coordinates)
  round 4 hole 4 unplated: 4(3,3) 4(3,47) 4(47,3) 4(47,47)

## Via types
v1: diameter 1.27, hole 0.711, Top Layer to Bottom Layer, 17 vias

## Nets (pads, with @x,y where several pads share a name; then routed paths per layer and width w, separated by ;. In a path a pad name is that pad's centre, name@x,y a point inside that pad or via, vN(x,y) a via of type N, cw(c..) or ccw(c..) an arc to the next point about the centre after c; other vN are vias at no path point)
FB: R3.1 R5.2 U1.1 | length 8.6
  Top Layer w0.3: U1.1 34.554,14.625 34.592,14.663 35.013,14.663 37.25,16.9 37.3,16.9 38,17.6 R5.2
GND: C1.1 C2.1 C3.1 D1.2 D2.2 J1.2 J2.2 J3.2 J4.2 R5.1 R7.1 U1.9 U1.10 | length 9.6
  Top Layer w0.3: v1(33.8,3.2) 35.95,3.2 C1.1 ; R5.1 v1(38,24.2) ; C3.1 v1(40.1,24.3) ; R7.1 v1(42.8,24.3)
  Top Layer w0.5: v1(36.3,13) 38.5,13
  other v1: 28.5,20.3 30.4,20.3 32.3,20.3
IC_GATE: C1.2 R2.1 U1.4 | length 13.8
  Top Layer w0.3: U1.4 33.596,12.675 33.473,12.552 33.432,12.552 33.123,12.243 33.123,10.123 36,7.246 C1.2 39.975,4.75 R2.1@40,4.775
NetD2_1: D2.1 R8.1 | length 3
  Top Layer w0.3: R8.1@26.7,15.5 D2.1@26.7,18.5
NetQ1_1: Q1.1 R2.2 | length 74.1
  Top Layer w0.5: v1(8.4,44.4) 10.925,44.4 11.05,44.275 11.05,43.89 12.675,43.89 Q1.1@12.8,43.765 ; v1(38,6.175) 39.725,6.175 39.775,6.125 R2.2@39.8,6.125
  Bottom Layer w0.5: v1(8.4,44.4) 8.4,6.968 9.193,6.175 v1(38,6.175)
OV: R6.2 R7.2 U1.7 | length 20.2
  Top Layer w0.3: U1.7@38.95,11.2 38.975,11.175 38.975,9.725 v1(39,9.7) ; R7.2 v1(42.8,19.2) 42.8,15.65 43.8,14.65 R6.2
  Bottom Layer w0.3: v1(39,9.7) 40.2,10.9 40.2,17.776 41.453,19.029 42.629,19.029 v1(42.8,19.2)
TMR: C3.2 U1.12 | length 7.3
  Top Layer w0.3: U1.12 38.95,14.625 40.1,15.775 C3.2
UV: R4.2 R6.1 U1.8 | length 8.3
  Top Layer w0.3: U1.8 39.295,12.025 41.1,10.22 41.1,10.05 R4.2 41.4,9.775 43.8,12.175 R6.1
"Vin 12V": C2.2 D1.1 J1.1 J2.1 Q1.2 R4.1 R8.2 U1.5 U1.6 | length 34.4
  Top Layer w0.5: R8.2@28.525,15.8 33.3,15.8 v1(34.4,16.9) ; U1.5 U1.6 34.5,11.375 36.653,9.222 36.653,8.247 v1(36.8,8.1) 36.9,8.2 41.3,8.2 R4.1
  Bottom Layer w0.8: v1(34.5,25.1) 34.45,25.05 34.45,16.95 v1(34.4,16.9) 34.4,10.5 v1(36.8,8.1)
"Vin 12V_N": Q1.3 R1.1 U1.3 | length 36.1
  Top Layer w0.381: R1.1 14.1,30.041 14.323,29.817 19.463,29.817 25.035,24.246 25.035,13.523 25.258,13.3 U1.3@33.428,13.3
"Vin 12V_P": J3.1 J4.1 R1.2 R3.2 U1.2 | length 45
  Top Layer w0.381: R1.2 14.1,28.959 14.323,29.182 19.2,29.182 24.4,23.982 24.4,13.26 25.36,12.3 v1(31.6,12.3) ; v1(31.6,14.4) 31.841,14.4 32.266,13.975 U1.2 35.775,13.975 38.7,16.9 R3.2
  Bottom Layer w0.381: v1(31.6,12.3) v1(31.6,14.4)
pads on no net: J1.3 J2.3 J3.3 J4.3 U1.11

## Polygon pours and split planes (outlines as drawn)
GND on Top Layer "GND_L01_P005" (solid, pour order 5): 27.3,24.1 33.6,24.1 33.6,18.1 27.3,18.1
"Vin 12V_P" on Top Layer "VIN_12V_P_L01_P002" (solid, pour order 2): 6,27.7 19.932,27.7 21.832,25.8 21.832,1.6 6,1.6
"Vin 12V_N" on Top Layer "VIN_12V_N_L01_P003" (solid, pour order 3): 2.7,41.75 18.3,41.75 18.3,31.25 2.7,31.25
"Vin 12V" on Top Layer "VIN_12V_L01_P000" (solid, pour order 0): 35.5,47.3 35.5,24.659 27.224,24.659 18.9,32.982 18.9,47.3
GND on Bottom Layer "GND_L02_P001" (solid, pour order 1): 48.5,1.5 1.5,1.5 1.5,48.5 48.5,48.5

## Silkscreen, mask and mechanical layers (free items; w line width, h text height)
Top Overlay:
  text "GND" at 36.6,43.2 h1
  text "GND" at 36.6,34 h1
  text "12V IN" at 33.2,33.1 h1 r90
  text "GND" at 10.3,21.6 h1
  text "GND" at 10.3,12.9 h1
  text "12V OUT" at 19.8,11.7 h1 r90
  text "Prabhnoor Rajput" at 49.4,7.5 h1 r90
  text "Cooling  PDB Rev0" at 47.5,7.4 h1 r90
Bottom Overlay:
  text "GND" at 39.3,43.2 h1
  text "2" at 6.156,42.211 h5 r90
  text "12V IN" at 33.2,38.6 h1 r90
  text "GND" at 39.2,34 h1
  text "GND" at 13,21.6 h1
  text "12V OUT" at 19.8,18.1 h1 r90
  text "GND" at 13,12.9 h1